# Altium PCB LORA_PCB.PcbDoc
Units mm, origin at the board's own origin, x right, y up, seen from the top; angles counter-clockwise.
Board outline 22 x 22 mm, 2 copper layers (Top Layer, Bottom Layer), stack 0.871 mm thick; 8 components, 6 nets, 33 pads, 69 vias.
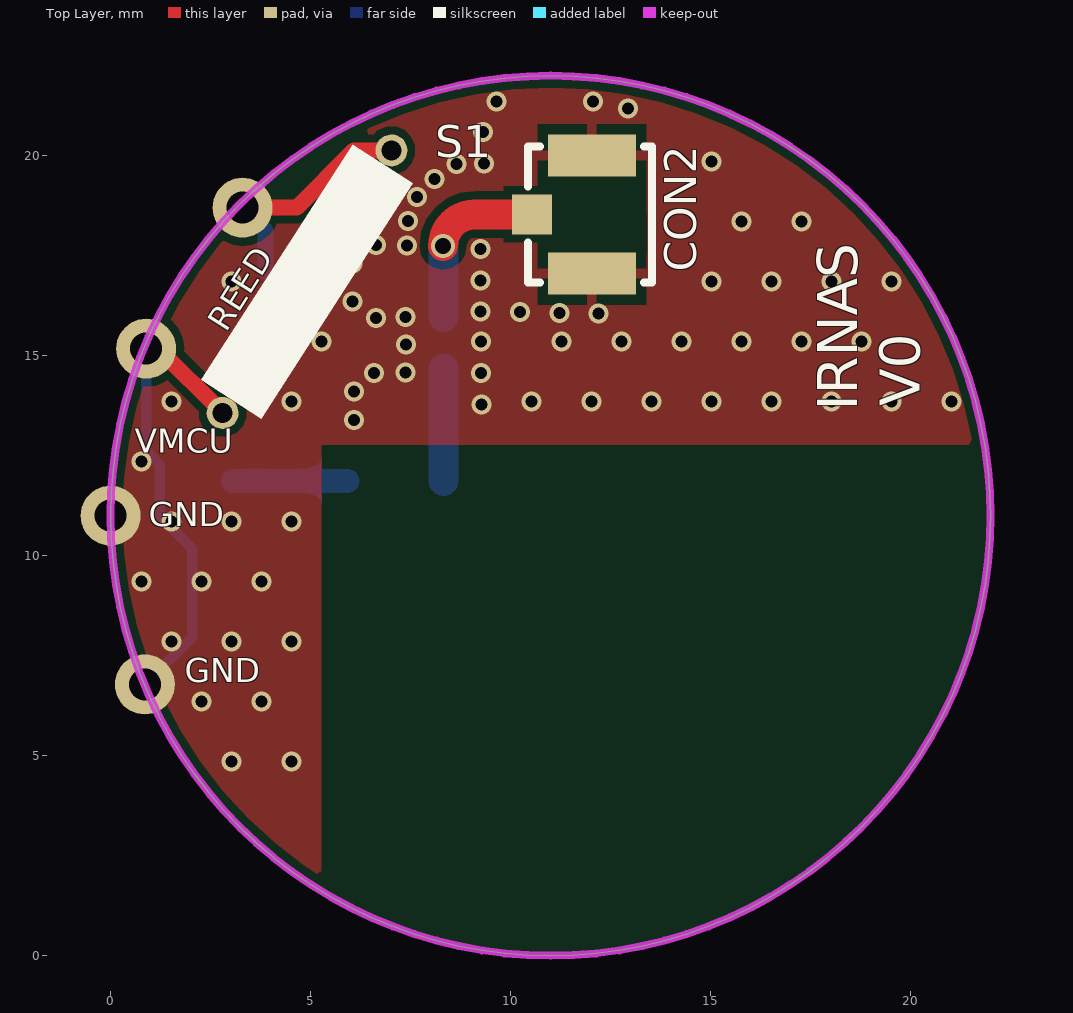
[diagram p0: Top Layer view]
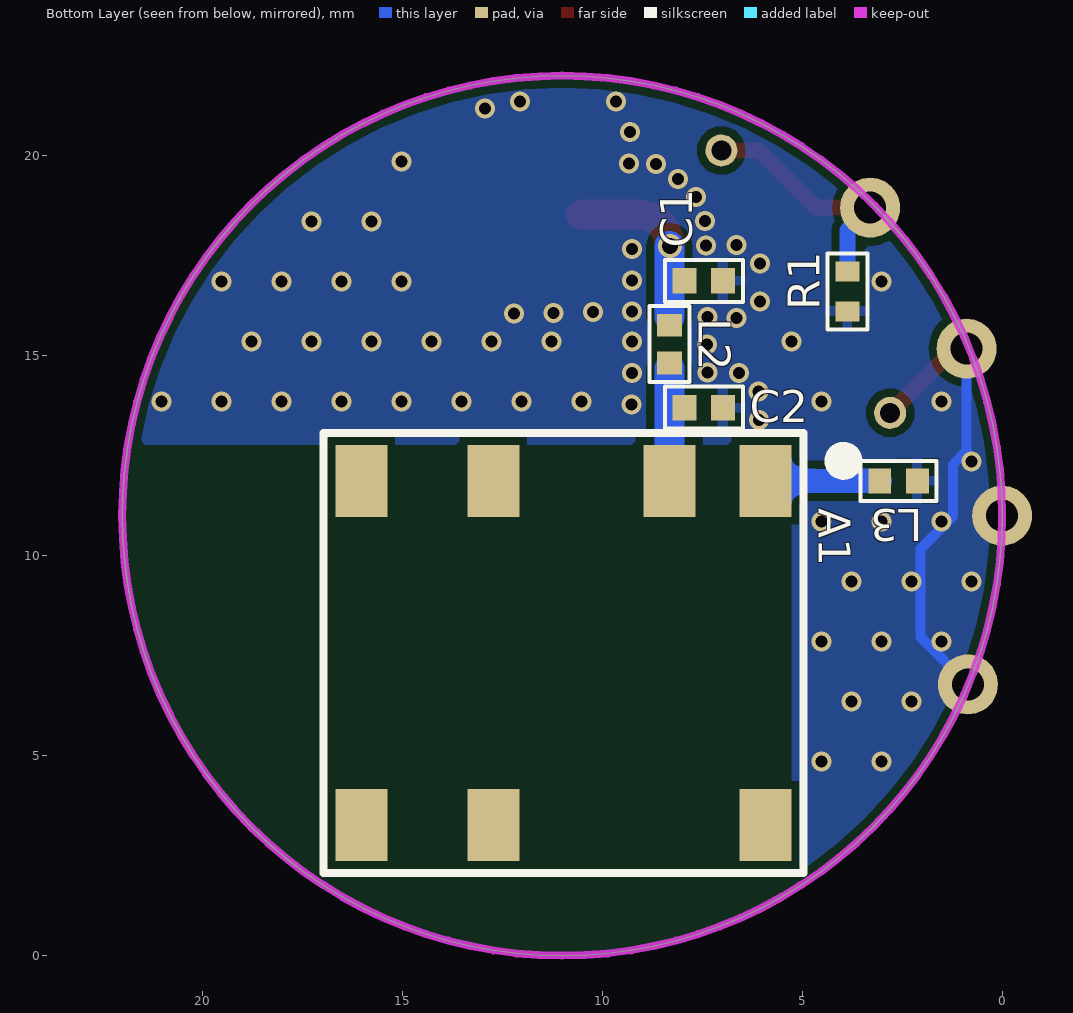
[diagram p1: Bottom Layer view, seen from below]
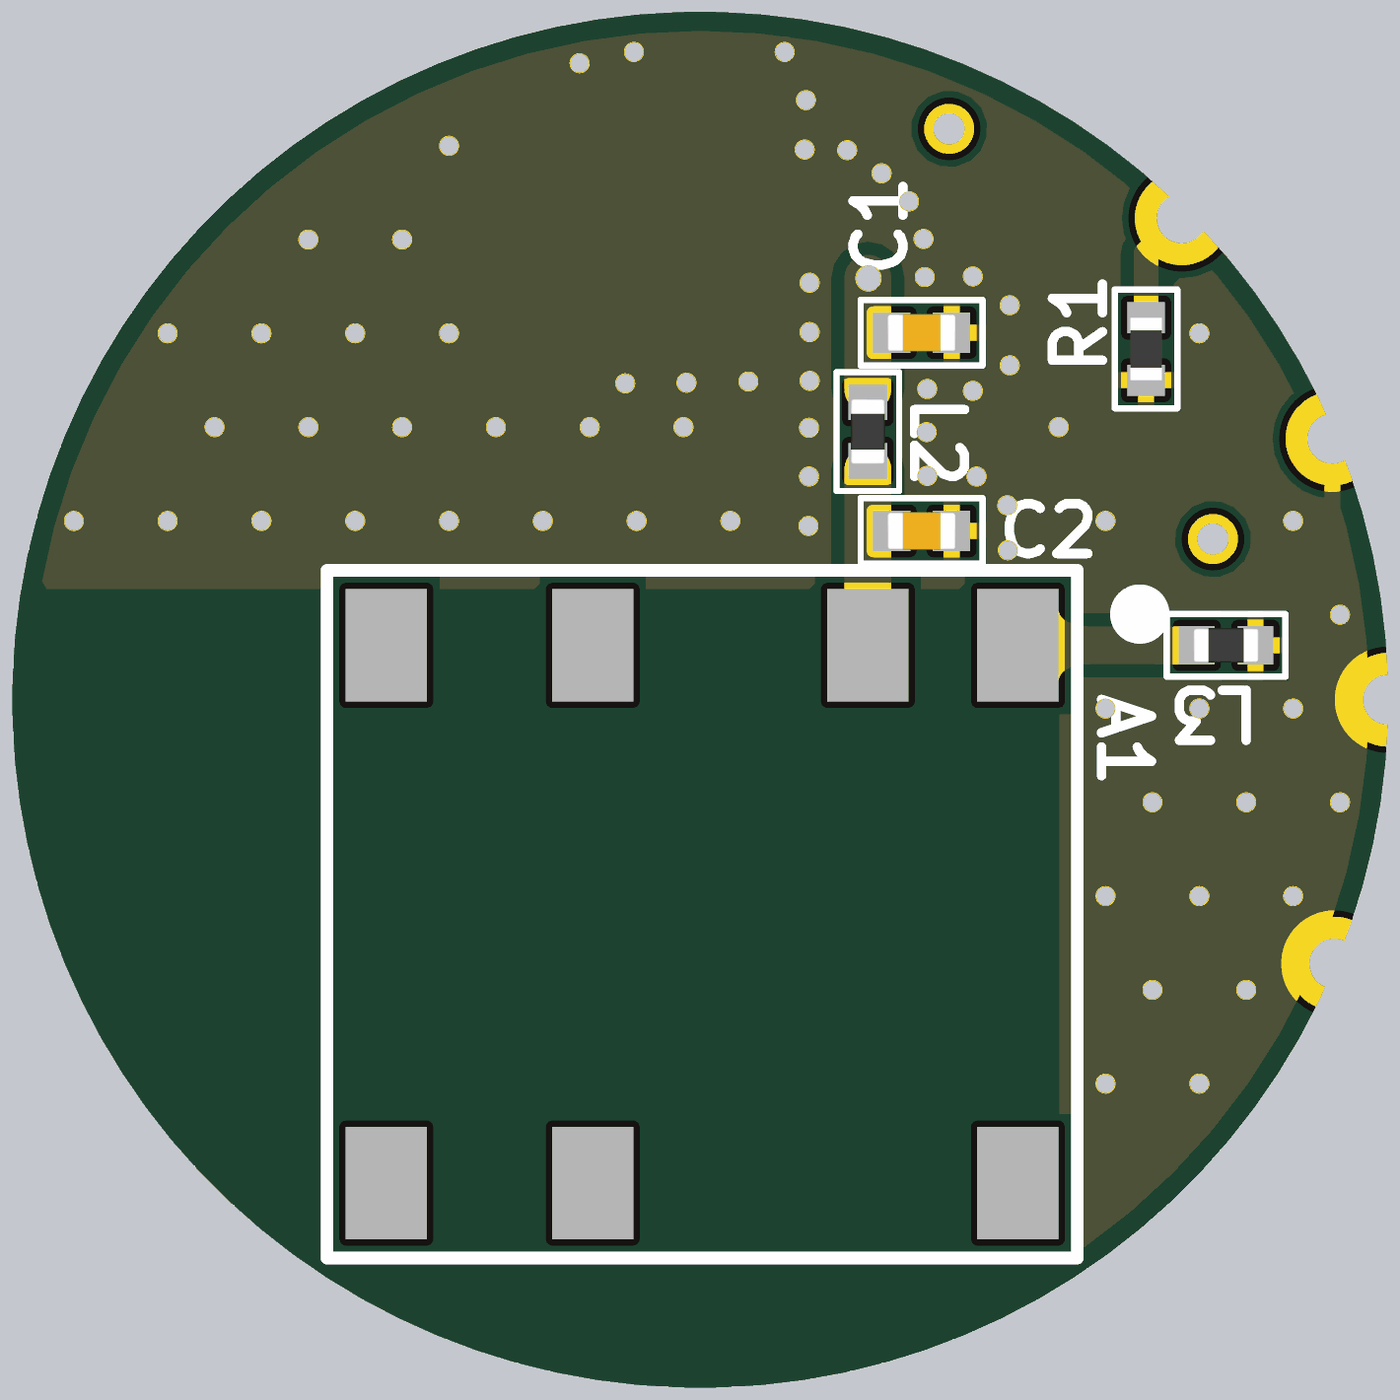
[diagram p2: 3D render of the assembled board from below, using the file's embedded part models]

## Layer stack, top to bottom
Top Solder: solder mask 0.0102, Solder Resist, Dk 3.5
Top Layer: signal copper 0.0356
Dielectric 1: dielectric 0.8, FR-4, Dk 4.8
Bottom Layer: signal copper 0.0356
Bottom Solder: solder mask 0.0102, Solder Resist, Dk 3.5

## Board outline
11,0 cw(c11,11) 0,11 cw(c11,11) 11,22 cw(c11,11) 22,11 cw(c11,11)

## Design rules (kind name [scope] priority, off if disabled: settings)
Clearance Clearance_1 [InComponent('CON1')] p1: gap=-100 ignorepadtopadclearanceinfootprint=FALSE
Clearance [All] p2: gap=0.2 ignorepadtopadclearanceinfootprint=FALSE
ComponentClearance ComponentClearance_1 [InComponent('CON1')] p1: gap=-100 collisioncheckmode=3 verticalgap=-100 showdistances=FALSE
ComponentClearance [All] p2: gap=0.254 collisioncheckmode=3 verticalgap=0.254 showdistances=FALSE
PolygonConnect [All] p1: thpad.connectstyle=Direct thpad.reliefconductorwidth=0.254 thpad.reliefentries=4 thpad.polygonreliefangle="90 Angle" thpad.airgapwidth=0.254 smdpad.connectstyle=Relief smdpad.reliefconductorwidth=0.254 smdpad.reliefentries=4 smdpad.polygonreliefangle="90 Angle" smdpad.airgapwidth=0.254 via.connectstyle=Direct via.reliefconductorwidth=0.254 via.reliefentries=4 via.polygonreliefangle="90 Angle" via.airgapwidth=0.254
RoutingVias [All] p1: holewidth=0.3 width=0.5 viastyle="Through Hole" minholewidth=0.3 minwidth=0.5 maxholewidth=1.5 maxwidth=2
SolderMaskExpansion [All] p1: expansion=0.102
Width [All] p1: maxlimit=5 minlimit=0.2 preferedwidth=0.4
29 further rules are at their usual default settings.

## Components (designator, comment, footprint, x,y, rotation, side; value= is the part's Value field where it differs from the comment)
A1 "SR42I010-R" LORA_PCB_ANTENNA 10.97,7.57 r0 bottom
C1 "1.8pF" CAP0402 7.46,16.87 r0 bottom
C2 "1.8pF" CAP0402 7.46,13.7 r0 bottom
CON2 "U.FL-R-SMT-1(10)" "ufl connector smd" 11.78,18.38 r90 top
L2 "4.3nH" IND0402 8.32,15.29 r270 bottom
L3 "4.3nH" IND0402 2.59,11.87 r0 bottom
R1 "100k" RES0402 3.87,16.61 r90 bottom
S1 "RI-70GP0715" RI-70GP0715 4.91,16.85 r237.25 top

## Footprints (in the part's own frame and the unit in brackets; to place one, negate y for a bottom-side part, rotate by r counter-clockwise, add the part's x,y. Pads: shape width x height; smd on the part's side, far side on the other; paste and mask are expansions set on the pad)
CAP0402 [mm] "Chip Capacitor, 2-Leads, Body 1.00x0.50mm, IPC Medium Density"
  rect 0.6x0.64 smd: 1(-0.48,0) 2(0.48,0)
  silkscreen extent -0.97,-0.53 0.97,0.53, body extent -0.55,-0.3 0.55,0.3, height 0.45
IND0402 [mm] "Chip Inductor, 2-Leads, Body 1.00x0.50mm, IPC Medium Density"
  rect 0.57x0.62 smd: 1(-0.47,0) 2(0.47,0)
  silkscreen extent -0.95,-0.5 0.95,0.5, body extent -0.52,-0.27 0.52,0.28, height 0.55
LORA_PCB_ANTENNA [mm]
  rect 1.3x1.8 smd: 1(-5.05,-4.3) 2(-2.65,-4.3) 3(1.75,-4.3) 4(5.05,-4.3) 5(5.05,4.3) 6(1.75,4.3) 7(-5.05,4.3)
  silkscreen extent -7.22,-5.5 6,5.5, body extent -6,-5.5 6,5.5, height 1.7
RES0402 [mm] "Chip Resistor, 2-Leads, Body 1.00x0.50mm, IPC Medium Density"
  rect 0.5x0.6 smd: 1(-0.5,0) 2(0.5,0)
  silkscreen extent -0.95,-0.5 0.95,0.5, body extent -0.5,-0.25 0.5,0.25, height 0.35
RI-70GP0715 [mm]
  round 0.8 hole 0.5: 1(-3.9,0) 2(3.9,0)
  silkscreen extent -3.5,-0.9 3.5,0.9, body extent -3.5,-0.6 3.5,0.6, height 1.25
"ufl connector smd" [mm]
  rect 1x1 smd: 1(0.15,1.248)
  rect 1.05x2.2 smd: 2(-1.325,-0.252) 2(1.625,-0.252)
  silkscreen extent -1.55,-1.75 1.85,1.35, body extent -1.55,-1.67 1.85,1.43, height 1.25

## Part data
A1: library part "ANT - SR42I010-R", "Antenna SMD -4dBi Gain 870MHz/928MHz Automotive 7-Pin SMD T/R", Manufacturer=Antenova, Supplier Part Number 1=237-SR42I010-R, Manufacturer Part Number=SR42I010-R, Pricing 1="1 = 2.36000, 10 = 1.90000, 50 = 1.90000, 100 = 1.52000, 1000 = 1.07000, 10000 = 0.95900 (USD)", Stock 1=3154, Supplier 1=Mouser
C1 C2: library part "C - 1.8pF/0402", "Multilayer Ceramic Capacitors MLCC - SMD/SMT 50volts 1.8pF C0G", Case/Package=0402, Case Code (Metric)=1005, Dielectric Material=Ceramic, IRNAS Part No.=/, Manufacturer=KEMET, Manufacturer Part Number=C0402C189B5GACTU, Max Operating Temperature=125°C, Min Operating Temperature=-55°C, Supplier Part Number 1=2820847, Voltage Rating=50V, Capacitance=1.8pF, Case Code (Imperial)=0402, ComponentLink1Description=https://datasheet.ciiva.com/5413/kem-c1003-c0g-smd-5413366.pdf, ComponentLink1URL=https://datasheet.ciiva.com/5413/kem-c1003-c0g-smd-5413366.pdf, Lead Free="Lead Free", Packaging="Tape and Reel", Pricing 1="10=0.463, 100=0.248, 500=0.182, 2500=0.153, 5000=0.134, 10000=0.11, 50000=0.0961 (EUR)", Stock 1=8950, Supplier 1=Farnell, Termination=SMD/SMT, Voltage Rating (DC)=50V
CON2: "RF / Coaxial Connector, U.FL Coaxial, Straight Jack, Surface Mount Vertical, 50 ohm, Brass", Dielectric Material="Liquid Crystal Polymer (LCP)", Frequency - Max=6GHz, Housing Color=Beige, Manufacturer=Hirose, Operating Temperature="-40°C ~ 90°C", Standard Package=2,500, Supplier Part Number 1=1688077, Voltage Rating=-, Body Finish=Silver, Body Material="Phosphor Bronze", Cable Group=-, Category="Connectors, Interconnects", Center Contact Material=Brass, Center Contact Plating=Gold, ComponentLink1Description=http://www.farnell.com/datasheets/91524.pdf, ComponentLink1URL=http://www.farnell.com/datasheets/91524.pdf, ComponentLink2Description=http://uk.rs-online.com/webdocs/1363/0900766b81363563.pdf, ComponentLink2URL=http://uk.rs-online.com/webdocs/1363/0900766b81363563.pdf, ComponentLink3Description=http://www.farnell.com/datasheets/1947917.pdf, ComponentLink3URL=http://www.farnell.com/datasheets/1947917.pdf, Connector Style="U.FL, Ultra Miniature Coaxial", Connector Type="Receptacle, Male Pin", Contact Termination=Solder, Family="Coaxial Connectors (RF)", Fastening Type=Snap-On, Featured Product="U.FL Series Connectors", Features=-, Impedance="50 Ohm", Ingress Protection=-, Manufacturer Part Number=U.FL-R-SMT-1(10), Mounting Type="Surface Mount", Online Catalog="UMCC (Ultra Miniature Coax Connectors), U.FL Series", Other Names="H11891TR  Q5400621  U.FL-R-SMT-1 10  U.FL-R-SMT-1(10)-ND  UFLRSMT110", Packaging="Tape & Reel (TR)", Series=U.FL, Shield Termination=Solder, Stock 1=0, Supplier 1=Farnell
L2 L3: library part "L - 4.3nH/0402", "Inductor RF Chip Multi-Layer 4.3nH 0.3nH 100MHz 8Q-Factor Air 300mA 210mOhm DCR 0402 Paper T/R", Case/Package=0402, Case Code (Metric)=1005, Current=300mA, DC Resistance (DCR)=210mR, Inductance=4.3nh, IRNAS Part No.=/, Manufacturer=Murata, Manufacturer Part Number=LQG15HN4N3S02D, Max Operating Temperature=125°C, Min Operating Temperature=-55°C, Package Quantity=10000, Self Resonant Frequency=6GHz, Supplier Part Number 1=490-6563-1-ND, Test Frequency=100MHz, Case Code (Imperial)=0402, ComponentLink1Description=http://uk.rs-online.com/webdocs/0f10/0900766b80f10808.pdf?src-supplier=RSComponents, ComponentLink1URL=http://uk.rs-online.com/webdocs/0f10/0900766b80f10808.pdf?src-supplier=RSComponents, ComponentLink2Description=http://search.murata.co.jp/Ceramy/image/img/PDF/ENG/L0075S0083LQG15HN.pdf?src-supplier=Avnet, ComponentLink2URL=http://search.murata.co.jp/Ceramy/image/img/PDF/ENG/L0075S0083LQG15HN.pdf?src-supplier=Avnet, ComponentLink3Description=http://www.farnell.com/datasheets/66026.pdf?src-supplier=Element14, ComponentLink3URL=http://www.farnell.com/datasheets/66026.pdf?src-supplier=Element14, ComponentLink4Description=https://www.verical.com/server-webapp/html/getDatasheet?partID=31252&src-supplier=Verical, ComponentLink4URL=https://www.verical.com/server-webapp/html/getDatasheet?partID=31252&src-supplier=Verical, ComponentLink5Description=http://search.murata.co.jp/Ceramy/image/img/PDF/ENG/L0075S0083LQG15HN.pdf?src-supplier=Avnet+Europe, ComponentLink5URL=http://search.murata.co.jp/Ceramy/image/img/PDF/ENG/L0075S0083LQG15HN.pdf?src-supplier=Avnet+Europe, ComponentLink6Description=https://search.murata.co.jp/Ceramy/image/img/P02/partnumberingAT_LQ3E.pdf?src-supplier=Digi-Key, ComponentLink6URL=https://search.murata.co.jp/Ceramy/image/img/P02/partnumberingAT_LQ3E.pdf?src-supplier=Digi-Key, Core Material=Air, Current Rating=300mA, DC Current=300mA, Depth=0.55mm, Height=0.5mm, Height - Seated (Max)=0.022inch, Lead Free="Lead Free", Length=1.05mm, Max DC Current=300mA, Military Standard=Not, Mount="Surface Mount", Packaging="Tape and Reel", Pricing 1="1 = 0.10000, 10 = 0.06100, 100 = 0.04040, 500 = 0.03366, 1000 = 0.02827, 2500 = 0.02423 (USD)", Q Factor=8, Radiation Hardening=No, REACH SVHC="No SVHC", RoHS=Yes, Shielding=Unshielded, Stock 1=3502, Supplier 1=Digi-Key, Termination=SMD/SMT, Width=0.02inch
R1: library part "R - 100k/0402", "MULTICOMP   MCWR04X1003FTL   RES, THICK FILM, 100KOHM, 1%, 0.0625W", Case/Package=0402, Case Code (Metric)=1005, IRNAS Part No.=I-100013, Manufacturer=Multicomp, Manufacturer Part Number=MCWR04X1003FTL, Power Rating=62.5mW, Resistance=100kR, Supplier Part Number 1=2447094, Temperature Coefficient=100ppm/°C, Tolerance=1%, Voltage Rating=50V, Case Code (Imperial)=0402, ComponentLink1Description=https://datasheet.ciiva.com/46386/1849611-46386524.pdf, ComponentLink1URL=https://datasheet.ciiva.com/46386/1849611-46386524.pdf, Composition="Thick Film", Mount="Surface Mount", Packaging="Cut Tape", Pricing 1="10=0.0029, 100=0.0017, 500=0.0012, 2500=0.001, 5000=0.0008 (EUR)", REACH SVHC="No SVHC", Stock 1=161188, Supplier 1=Farnell, Voltage Rating (DC)=50V
S1: library part "Reed Switch"

## Free pads (board coordinates)
  round 1.5 hole 0.8: 12(0.857,6.78) 13(0,11) 14(0.89,15.176) 15(3.3,18.7)
  round 0.25 hole 0.8 unplated: 16(4.04,1.5) 16(4.967,0.9) 16(5.047,21.097) 16(22.37,7.99) 16(22.64,9.1) 17(6.025,21.607) 18(6.997,22.027)

## Via types
v1: diameter 0.5, hole 0.3, Top Layer to Bottom Layer, tented both sides, 68 vias
v2: diameter 0.6, hole 0.4, Top Layer to Bottom Layer, tented both sides, 1 vias

## Nets (pads, with @x,y where several pads share a name; then routed paths per layer and width w, separated by ;. In a path a pad name is that pad's centre, name@x,y a point inside that pad or via, vN(x,y) a via of type N, cw(c..) or ccw(c..) an arc to the next point about the centre after c; other vN are vias at no path point)
GND: C1.1 C2.1 CON2.2 L3.1 pad.12 pad.13 R1.1 | length 9.4
  Bottom Layer w0.254: pad.12 2.04,7.963 2.04,10.17 1.23,10.98 1.23,12.28 0.89,12.62 0.89,15.176
  other v1: 3.018,4.86 4.518,4.86 2.268,6.36 3.768,6.36 1.518,7.86 3.018,7.86 4.518,7.86 0.768,9.36 2.268,9.36 3.768,9.36 1.518,10.86 3.018,10.86 4.518,10.86 0.768,12.36 6.08,13.39 9.27,13.78 1.518,13.86 4.518,13.86 10.518,13.86 12.018,13.86 13.518,13.86 15.018,13.86 16.518,13.86 18.018,13.86 19.518,13.86 21.018,13.86 6.09,14.11 6.58,14.57 7.37,14.58 9.26,14.57 7.38,15.28 9.26,15.35 5.268,15.36 11.268,15.36 12.768,15.36 14.268,15.36 15.768,15.36 17.268,15.36 18.768,15.36 6.64,15.94 7.37,15.97 12.2,16.06 10.23,16.09 11.22,16.07 9.25,16.1 6.05,16.349 3.018,16.86 9.25,16.88 15.018,16.86 16.518,16.86 18.018,16.86 19.518,16.86 6.05,17.31 9.25,17.67 7.41,17.76 6.64,17.77 7.43,18.37 15.768,18.36 17.268,18.36 7.66,18.97 8.1,19.42 8.65,19.79 9.33,19.8 15.018,19.86 9.31,20.59 12.93,21.18 9.65,21.36 12.06,21.36
NetA1_1: A1.1 L3.2 | length 2.9
  Bottom Layer w0.6: L3.2 A1.1
NetA1_2: A1.2 C2.2 L2.2 | length 2.8
  Bottom Layer w0.75: A1.2 L2.2@8.32,14.68
NetC1_2: C1.2 CON2.1 L2.1 | length 4.5
  Top Layer w0.75: v2(8.31,17.74) cw(c9.1,17.74) 9.1,18.53 CON2.1
  Bottom Layer w0.6: 8.31,17.23 8.32,17.22 ; v2(8.31,17.74) v2@8.32,17.74
  Bottom Layer w0.75: L2.1@8.32,15.97 8.32,17.22 v2@8.32,17.74
REED: pad.15 R1.2 S1.1 | length 6.1
  Top Layer w0.4: pad.15 4.65,18.7 6.08,20.13 S1.1
  Bottom Layer w0.4: pad.15 3.87,18.13 R1.2
VMCU: pad.14 S1.2 | length 2.6
  Top Layer w0.4: pad.14 1.194,15.176 S1.2
pads on no net: A1.3 A1.4 A1.5 A1.6 A1.7

## Polygon pours and split planes (outlines as drawn)
GND on Bottom Layer "Bottom Layer-GND" (solid, remove dead copper, pour order 0): 11,0 ccw(c11,10.993) 21.993,10.993 21.993,11.007 ccw(c11,11.007) 11,22 ccw(c11,11) 0,11 ccw(c11,11)
GND on Top Layer "Top Layer-GND" (solid, pour order 2): 0,11 cw(c11,11) 11,22 cw(c11,11) 22,11 cw(c11,11) 11,0 cw(c11,11)

## Keep-outs
Keep-Out Layer:
  circle w0.2: c11,11 r11

## Other copper
Top Layer:
  pour cut-out: 5.27,1.59 5.27,12.776 21.852,12.776 cw(c11.085,10.931) 11.084,0.006 10.936,0.006 cw(c10.935,10.932)
  pour cut-out: 13.388,19.48 10.942,19.48 10.942,17.59 13.398,17.59
Bottom Layer:
  pour cut-out: 5.26,1.584 5.26,12.77 21.842,12.77 cw(c11.075,10.925) 11.074,0 10.926,0 cw(c10.925,10.925)

## Silkscreen, mask and mechanical layers (free items; w line width, h text height)
Top Overlay:
  text "REED" at 2.89,15.56 h0.6 r57.75
  text "V0" at 20.23,13.73 h1 r90
  text "IRNAS" at 18.67,13.62 h1 r90
  text "VMCU" at 0.6,12.57 h0.6
  text "GND" at 0.96,10.74 h0.6
  text "GND" at 1.86,6.83 h0.6
Route Tool Path:
  lines w2: 3.117,1.976 cw(c11.007,11.017) 3.873,20.666 ; 5.706,0.251 ccw(c11.007,11.017) 22.301,6.96 ; 7.99,22.632 cw(c11.007,11.017) 23.007,11.017 cw(c11.007,11.017) 22.97,10.074